# EAGLE board untitled (EAGLE 5.07)
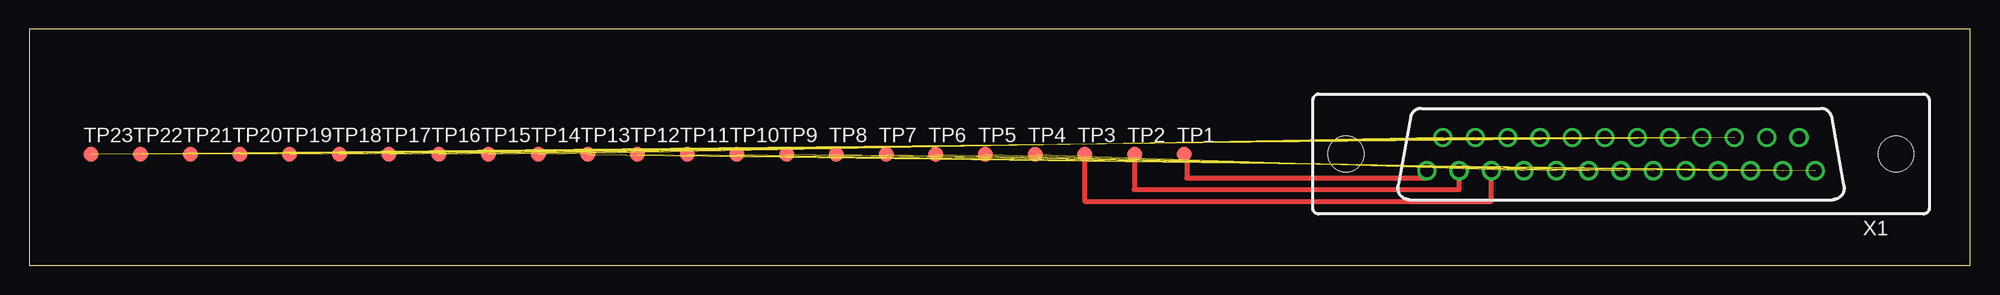
[diagram p0: board, top side]

Size 166.01 x 20.24 mm. Coordinates in mm from the lower left corner, seen from the top.
Outline: 0,0 166.01,0 166.01,20.24 0,20.24 0,0
Copper layers (1*16): Top 0.035mm / dielectric 1.5mm / Bottom 0.035mm
Design rules "default": minimum track width 10mil, minimum drill 24mil, track to track 8mil, track to pad 8mil, pad to pad 8mil, via to via 8mil, smd to smd 8mil, copper to edge 40mil, drill to drill 8mil, minimum pad ring 10mil, minimum via ring 8mil, stop-mask expansion 4mil, vias tented up to drill 0mil, thermal gap 10mil

## Footprints (pad centres in the part's own frame; a part is rotated, then mirrored left to right if it is on the bottom)
B1,27 = smd 1.27 x 1.27: TP 0,0
H2R25ST = drill 1.092 round: 1 16.612,1.422; 2 13.843,1.422; 3 11.074,1.422; 4 8.306,1.422; 5 5.537,1.422; 6 2.769,1.422; 7 0,1.422; 8 -2.769,1.422; 9 -5.537,1.422; 10 -8.306,1.422; 11 -11.074,1.422; 12 -13.843,1.422; 13 -16.612,1.422; 14 15.227,-1.422; 15 12.459,-1.422; 16 9.69,-1.422; 17 6.921,-1.422; 18 4.153,-1.422; 19 1.384,-1.422; 20 -1.384,-1.422; 21 -4.153,-1.422; 22 -6.921,-1.422; 23 -9.69,-1.422; 24 -12.459,-1.422; 25 -15.227,-1.422 | hole 3.048: -23.52,0; 23.52,0

## Placement (x,y rotation side)
TP1  PTR1B1,27  [B1,27]  98.79,9.51 0 top
TP2  PTR1B1,27  [B1,27]  94.54,9.51 0 top
TP3  PTR1B1,27  [B1,27]  90.29,9.51 0 top
TP4  PTR1B1,27  [B1,27]  86.04,9.51 0 top
TP5  PTR1B1,27  [B1,27]  81.78,9.51 0 top
TP6  PTR1B1,27  [B1,27]  77.53,9.51 0 top
TP7  PTR1B1,27  [B1,27]  73.28,9.51 0 top
TP8  PTR1B1,27  [B1,27]  69.03,9.51 0 top
TP9  PTR1B1,27  [B1,27]  64.78,9.51 0 top
TP10  PTR1B1,27  [B1,27]  60.53,9.51 0 top
TP11  PTR1B1,27  [B1,27]  56.28,9.51 0 top
TP12  PTR1B1,27  [B1,27]  52.03,9.51 0 top
TP13  PTR1B1,27  [B1,27]  47.78,9.51 0 top
TP14  PTR1B1,27  [B1,27]  43.53,9.51 0 top
TP15  PTR1B1,27  [B1,27]  39.28,9.51 0 top
TP16  PTR1B1,27  [B1,27]  35.02,9.51 0 top
TP17  PTR1B1,27  [B1,27]  30.77,9.51 0 top
TP18  PTR1B1,27  [B1,27]  26.52,9.51 0 top
TP19  PTR1B1,27  [B1,27]  22.27,9.51 0 top
TP20  PTR1B1,27  [B1,27]  18.02,9.51 0 top
TP21  PTR1B1,27  [B1,27]  13.77,9.51 0 top
TP22  PTR1B1,27  [B1,27]  9.52,9.51 0 top
TP23  PTR1B1,27  [B1,27]  5.27,9.51 0 top
X1  D-SUB25-H2R25ST  [H2R25ST]  136.14,9.55 180 top

## Library data of the parts
TP1-TP23 = testpad
X1 = con-thomas-betts

## Nets
N$1: TP1.TP X1.1
N$2: TP2.TP X1.2
N$3: TP3.TP X1.3
N$4: TP4.TP X1.4
N$5: TP5.TP X1.5
N$6: TP6.TP X1.6
N$7: TP7.TP X1.7
N$8: TP8.TP X1.8
N$9: TP9.TP X1.9
N$10: TP10.TP X1.10
N$11: TP11.TP X1.11
N$12: TP12.TP X1.12
N$13: TP13.TP X1.13
N$14: TP14.TP X1.14
N$15: TP15.TP X1.15
N$16: TP16.TP X1.16
N$17: TP17.TP X1.17
N$18: TP18.TP X1.18
N$19: TP19.TP X1.19
N$20: TP20.TP X1.20
N$21: TP21.TP X1.21
N$22: TP22.TP X1.22
N$23: TP23.TP X1.23

## Tracks (layer width: path | path; a pad name or v marks a point on that pad's centre or on a via)
N$1
  Top 0.406: TP1.TP 99.01,9.51 99.01,7.5 119.53,7.5 X1.1
N$2
  Top 0.406: TP2.TP 94.51,9.51 94.51,6.5 122.3,6.5 X1.2
N$3
  Top 0.406: TP3.TP 90.26,9.51 90.26,5.5 125.07,5.5 X1.3
N$4  (1 unrouted)
N$5  (1 unrouted)
N$6  (1 unrouted)
N$7  (1 unrouted)
N$8  (1 unrouted)
N$9  (1 unrouted)
N$10  (1 unrouted)
N$11  (1 unrouted)
N$12  (1 unrouted)
N$13  (1 unrouted)
N$14  (1 unrouted)
N$15  (1 unrouted)
N$16  (1 unrouted)
N$17  (1 unrouted)
N$18  (1 unrouted)
N$19  (1 unrouted)
N$20  (1 unrouted)
N$21  (1 unrouted)
N$22  (1 unrouted)
N$23  (1 unrouted)